# Altium PCB MotorPCB-v6.PcbDoc
Units mil, origin at the board's own origin, x right, y up, seen from the top; angles counter-clockwise.
Board outline 3900 x 3900 mil, 2 copper layers (Top Layer, Bottom Layer); 65 components, 63 nets, 245 pads, 83 vias.
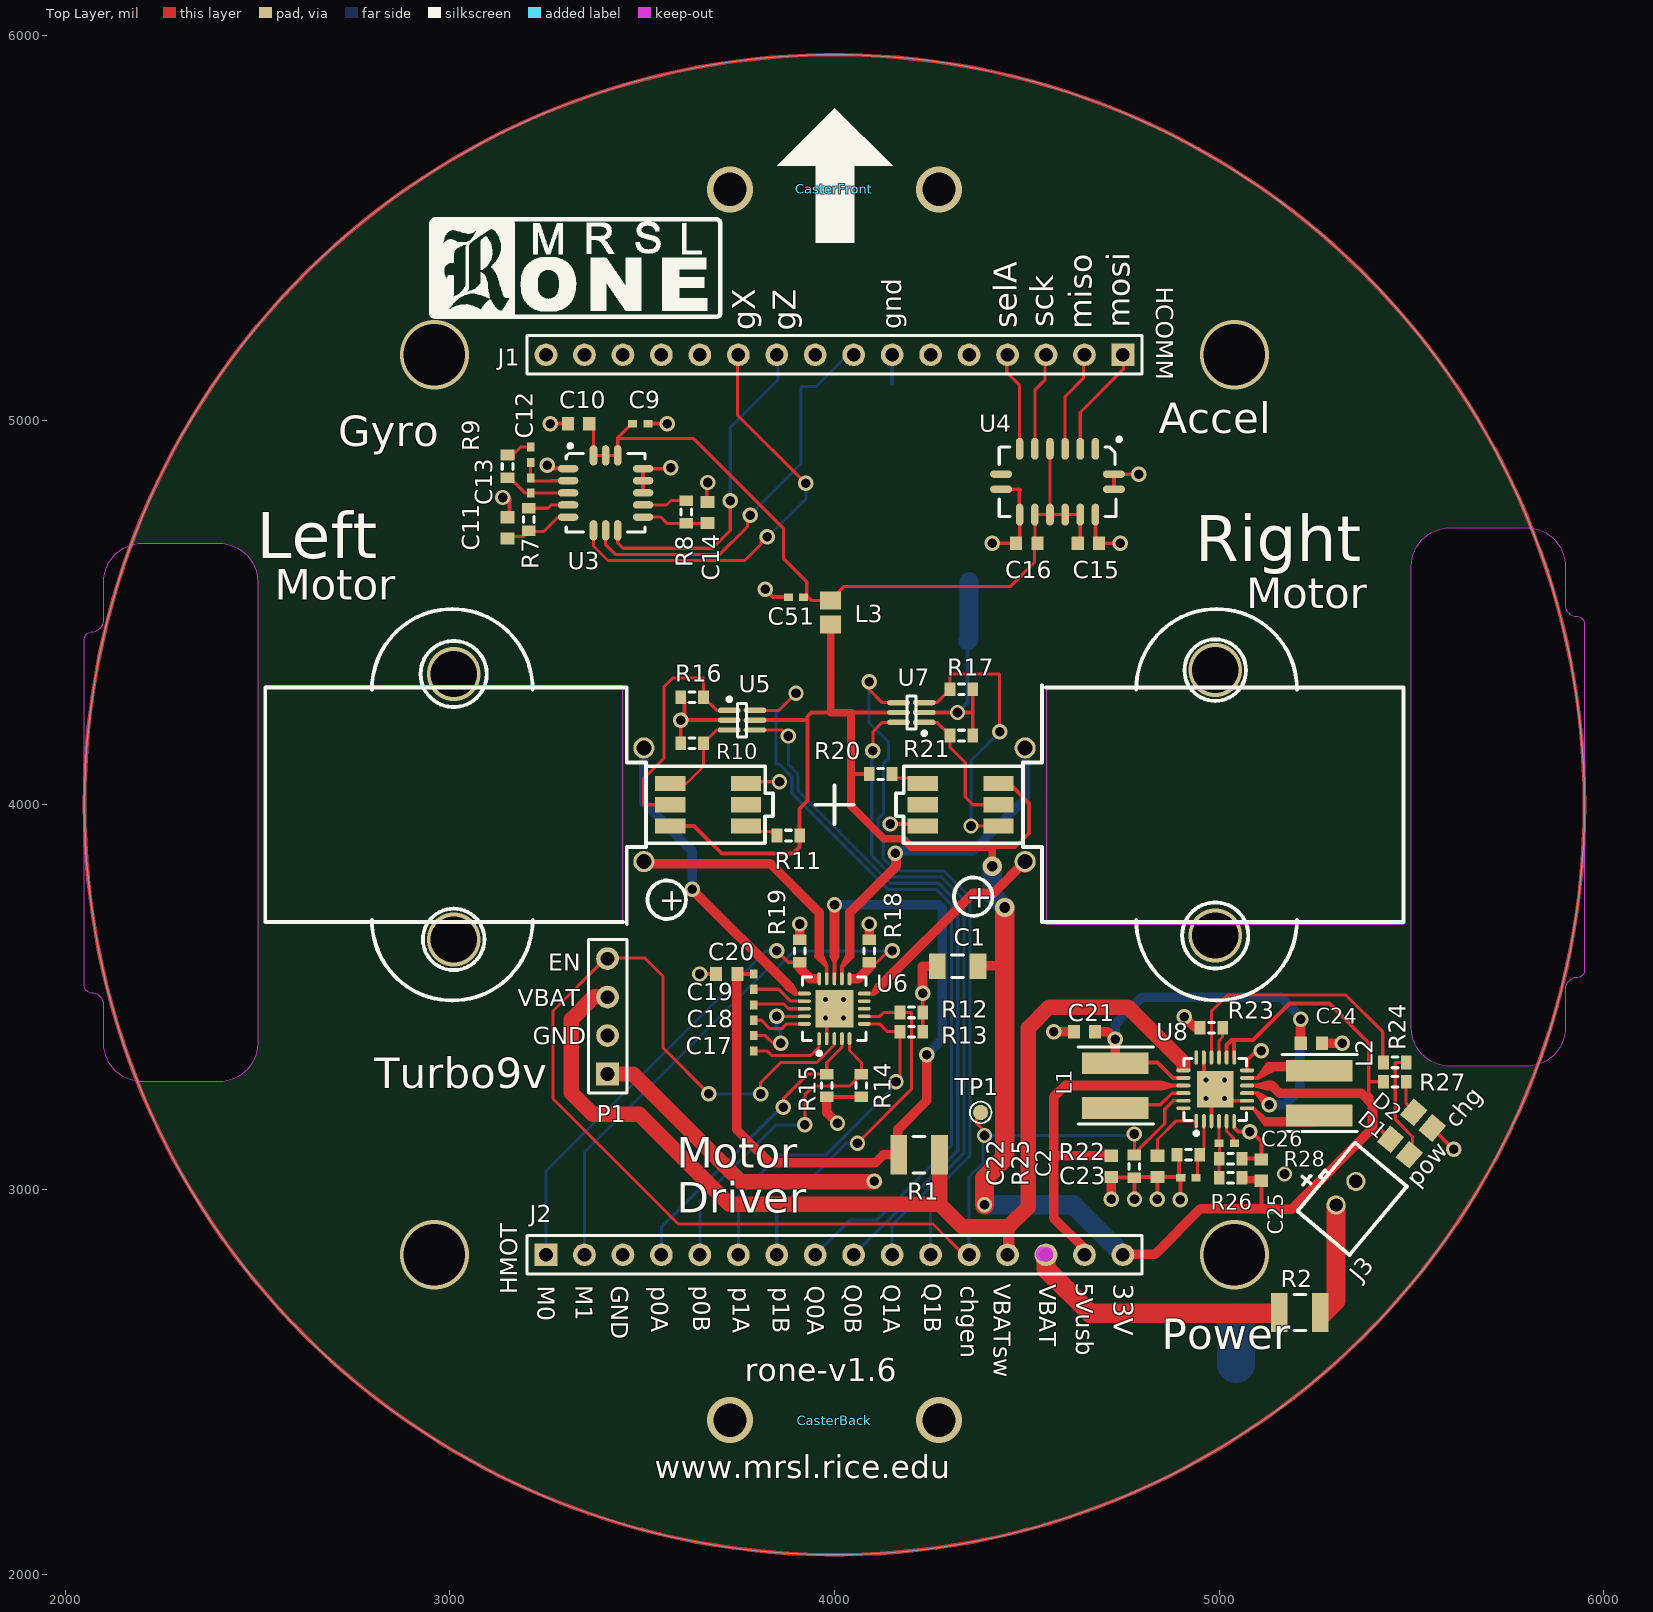
[diagram p0: Top Layer view]
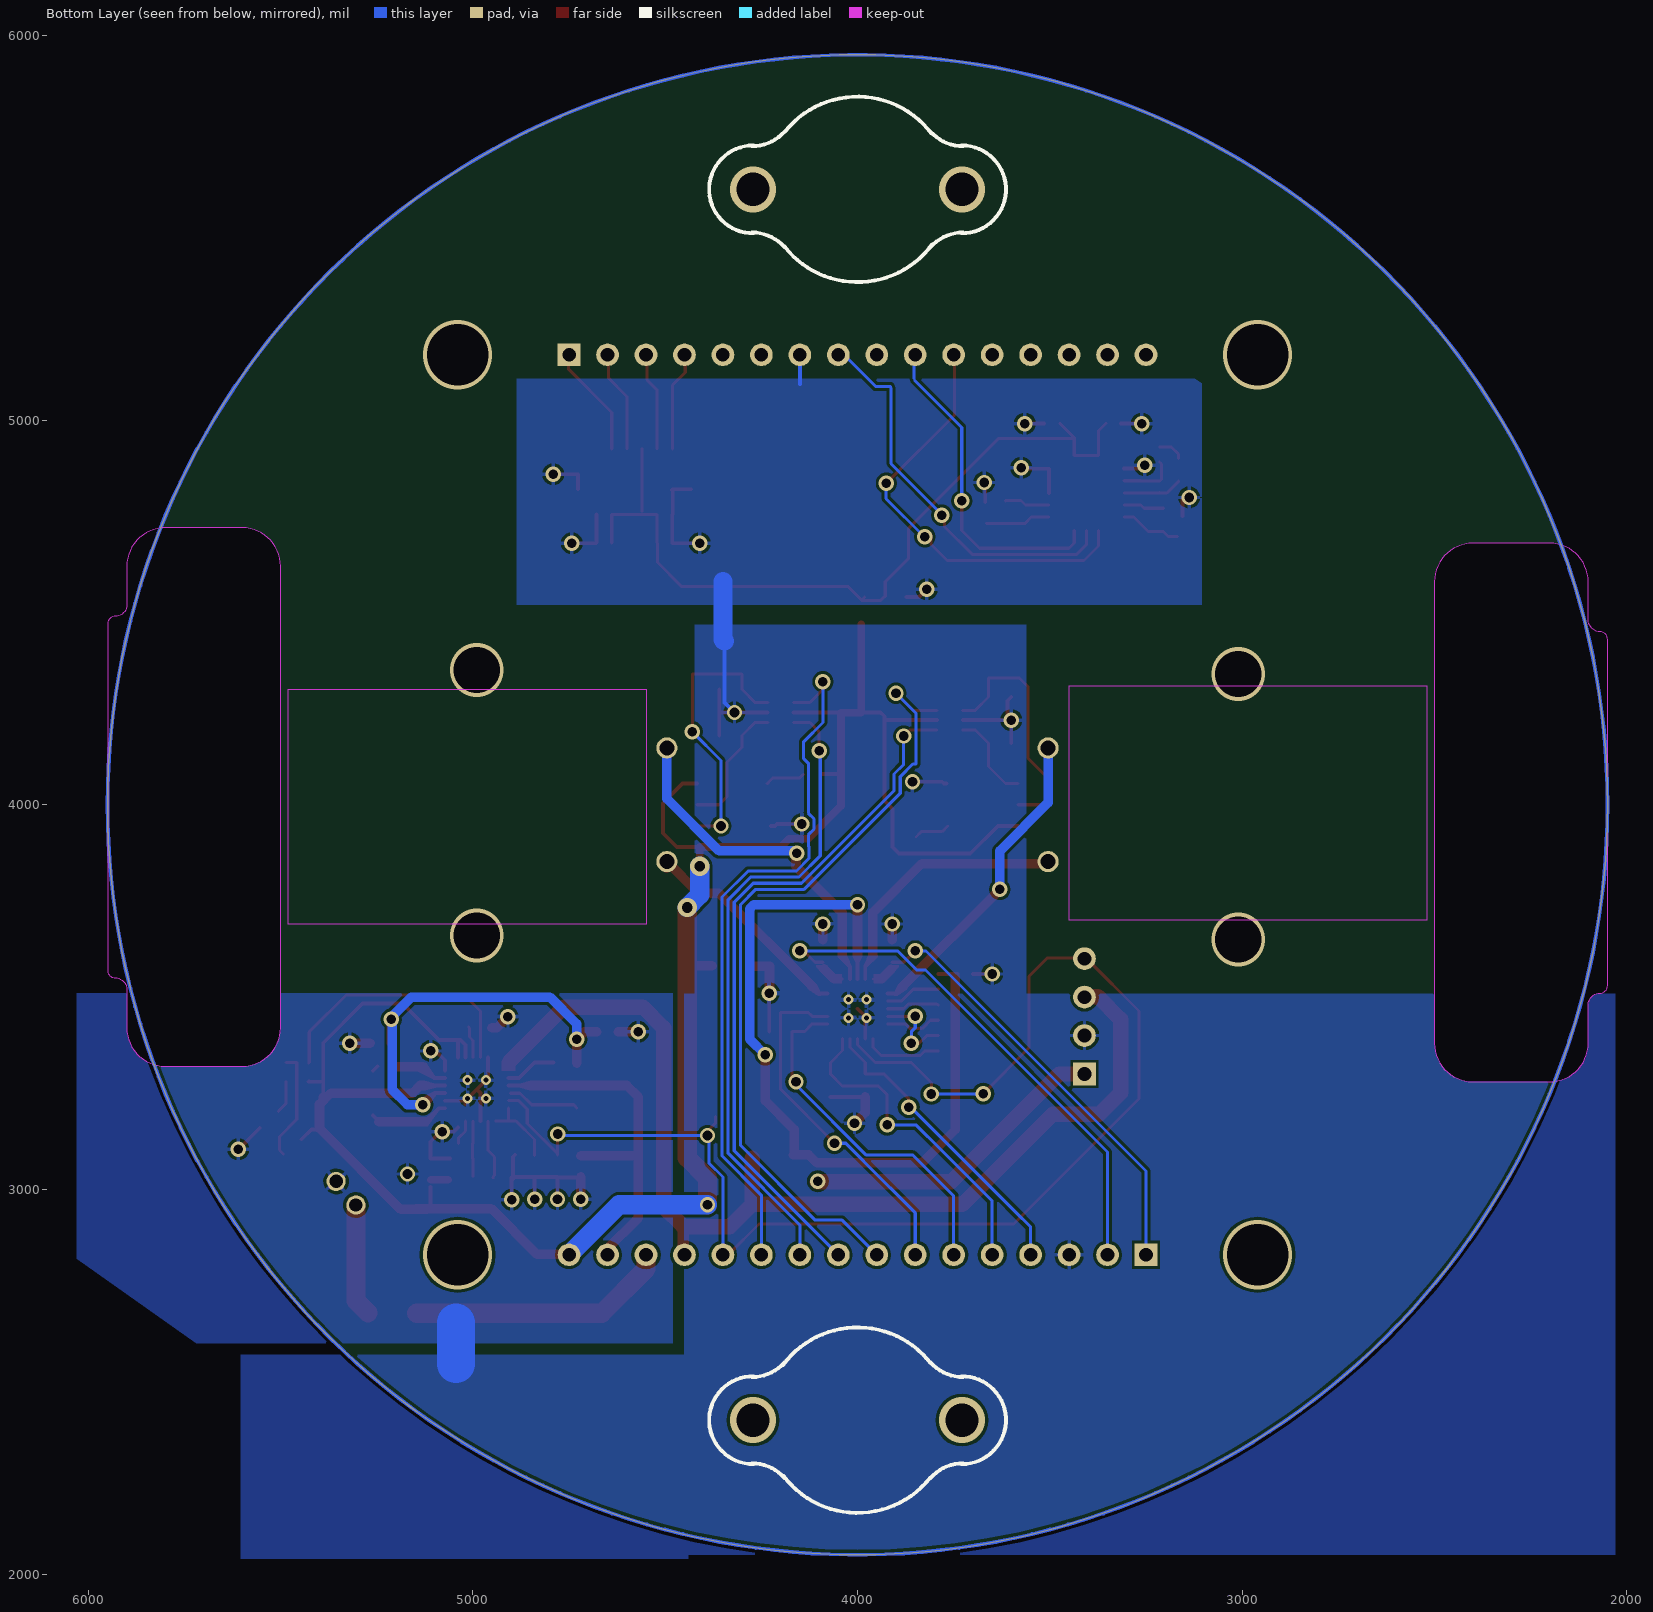
[diagram p1: Bottom Layer view, seen from below]

## Layer stack, top to bottom
Top Layer: signal copper 1.4
Dielectric: dielectric 12.6, FR-4, Dk 4.8
Bottom Layer: signal copper 1.4

## Board outline
4000,2050 cw(c4000,4000) 2050,4000 cw(c4000,4000) 4000,5950 cw(c4000,4000) 5950,4000 cw(c4000,4000)
cut-out: 2050,4430 cw(c2070,4430) 2070,4450 ccw(c2070,4480) 2100,4480 2100,4580 cw(c2200,4580) 2200,4680 2400,4680 cw(c2400,4580) 2500,4580 2500,3379.76 cw(c2400,3379.76) 2400,3279.76 2200,3279.76 cw(c2200,3379.76) 2100,3379.76 2100,3480 ccw(c2070,3480) 2070,3510 cw(c2070,3530) 2050,3530
cut-out: 5950,3570 cw(c5930,3570) 5930,3550 ccw(c5930,3520) 5900,3520 5900,3420 cw(c5800,3420) 5800,3320 5600,3320 cw(c5600,3420) 5500,3420 5500,4620.24 cw(c5600,4620.24) 5600,4720.24 5800,4720.24 cw(c5800,4620.24) 5900,4620.24 5900,4520 ccw(c5930,4520) 5930,4490 cw(c5930,4470) 5950,4470

## Design rules (kind name [scope] priority, off if disabled: settings)
Clearance [All] p1: gap=8
PolygonConnect [All] p1: connectstyle=Relief reliefconductorwidth=10 reliefentries=4 polygonreliefangle="90 Angle"
RoomDefinition motorEncoder [InComponentClass('motorEncoder')] p1: confinementstyle=ConfineIn formatcopy=TRUE lockcomponents=FALSE outline 0,0 2000,0 2000,1000 0,1000
RoomDefinition GyroAccelHeaders [InComponentClass('GyroAccelHeaders')] p2: confinementstyle=ConfineIn formatcopy=TRUE lockcomponents=FALSE outline 6000,2080 6350,2080 6350,2300 6000,2300
RoomDefinition power [InComponentClass('power')] p3: confinementstyle=ConfineIn formatcopy=TRUE lockcomponents=FALSE outline 6100,2000 8760,2000 8760,2340 6100,2340
RoutingVias [All] p1: holewidth=25 width=40 viastyle="Through Hole" minholewidth=25 minwidth=40 maxholewidth=25 maxwidth=40
SMDNeckDown [All] p1: percent=50.000
SilkscreenOverComponentPads [All] p1: minsilkscreentomaskgap=10
SolderMaskExpansion [All] p1: expansion=4
Width "Schematic Width Constraint_2" [InNet('VBAT')] p1: maxlimit=25 minlimit=10 preferedwidth=25 minimp=50.000000 maximp=50.000000 favimp=50.000000
Width "Schematic Width Constraint_15" [InNet('9V_OUT')] p2: maxlimit=25 minlimit=10 preferedwidth=20 minimp=50.000000 maximp=50.000000 favimp=50.000000
Width "Schematic Width Constraint_14" [InNet('NetJ3_1')] p3: maxlimit=25 minlimit=10 preferedwidth=25 minimp=50.000000 maximp=50.000000 favimp=50.000000
Width "Schematic Width Constraint_13" [InNet('5VUSB_SW')] p4: maxlimit=25 minlimit=10 preferedwidth=25 minimp=50.000000 maximp=50.000000 favimp=50.000000
Width "Schematic Width Constraint_12" [InNet('MOT_0B')] p5: maxlimit=25 minlimit=10 preferedwidth=20 minimp=50.000000 maximp=50.000000 favimp=50.000000
Width "Schematic Width Constraint_11" [InNet('MOT_0A')] p6: maxlimit=25 minlimit=10 preferedwidth=20 minimp=50.000000 maximp=50.000000 favimp=50.000000
Width "Schematic Width Constraint_10" [InNet('MOT1_B')] p7: maxlimit=25 minlimit=10 preferedwidth=20 minimp=50.000000 maximp=50.000000 favimp=50.000000
Width "Schematic Width Constraint_9" [InNet('MOT1_A')] p8: maxlimit=25 minlimit=10 preferedwidth=20 minimp=50.000000 maximp=50.000000 favimp=50.000000
Width "Schematic Width Constraint_8" [InNet('VBAT_MOT_SW')] p9: maxlimit=25 minlimit=10 preferedwidth=20 minimp=50.000000 maximp=50.000000 favimp=50.000000
Width "Schematic Width Constraint_7" [InNet('VBAT +300')] p10: maxlimit=25 minlimit=10 preferedwidth=25 minimp=50.000000 maximp=50.000000 favimp=50.000000
Width "Schematic Width Constraint_6" [InNet('NetL2_1')] p11: maxlimit=25 minlimit=10 preferedwidth=25 minimp=50.000000 maximp=50.000000 favimp=50.000000
Width "Schematic Width Constraint_5" [InNet('NetL2_2')] p12: maxlimit=25 minlimit=10 preferedwidth=25 minimp=50.000000 maximp=50.000000 favimp=50.000000
Width "Schematic Width Constraint_3" [InNet('VBAT_SW')] p13: maxlimit=50 minlimit=10 preferedwidth=25 minimp=50.000000 maximp=50.000000 favimp=50.000000
Width "Schematic Width Constraint_1" [InNet('GND')] p14: maxlimit=25 minlimit=10 preferedwidth=25 minimp=50.000000 maximp=50.000000 favimp=50.000000
Width "Schematic Width Constraint" [InNet('3.3V')] p15: maxlimit=100 minlimit=10 preferedwidth=25 minimp=50.000000 maximp=50.000000 favimp=50.000000
Width MotorWidth [InNetClass('MotorNets')] p16: maxlimit=25 minlimit=8 preferedwidth=25
Width [All] p17: maxlimit=8 minlimit=8 preferedwidth=8
27 further rules are at their usual default settings.

## Classes and differential pairs
component class GyroAccelHeaders: C1 C9 C10 C11 C12 C13 C14 C15 C16 C51 J1 J2 L3 R7 R8 R9 U3 U4
component class motorEncoder: C17 C18 C19 C20 CasterBack CasterFront Left P1 R1 R10 R11 R12 R13 R14 R15 R16 R17 R18 R19 R20 R21 Right U5 U6 U7
component class power: C2 C21 C22 C23 C24 C25 C26 D1 D2 J3 L1 L2 R2 R22 R23 R24 R25 R26 R27 R28 TP1 U8

## Components (designator, comment, footprint, x,y, rotation, side; value= is the part's Value field where it differs from the comment)
C1 "Cap Semi" CAPC3216L 4320,3580 r0 top
C2 "Cap" CAPC1608L 4839.84,3060 r270 top
C9 "Cap Semi" CAPC1005L 3495,4991 r180 top
C10 "Cap Semi" CAPC1608L 3335,4991 r0 top
C11 "Cap Semi" CAPC1608L 3150,4720 r270 top
C12 "Cap Semi" CAPC1005L 3210,4910 r270 top
C13 "Cap Semi" CAPC1005L 3210,4830 r90 top
C14 "Cap Semi" CAPC1608L 3670,4760 r270 top
C15 "Cap Semi" CAPC1608L 4660,4680 r180 top
C16 "Cap Semi" CAPC1608L 4500,4680 r0 top
C17 "Cap Semi" CAPC1005L 3790,3380 r270 top
C18 "Cap Semi" CAPC1005L 3789.69,3459.37 r270 top
C19 "Cap Semi" CAPC1005L 3790,3540 r270 top
C20 "Cap Semi" CAPC1608L 3720,3560 r0 top
C21 "Cap" CAPC1608L 4650,3410 r0 top
C22 "Cap" CAPC1608L 4720,3060 r90 top
C23 "Cap" CAPC1005L 4920,3030.16 r0 top
C24 "Cap" CAPC1608L 5240,3380 r0 top
C25 "Cap" CAPC1608L 5110,3050 r270 top
C26 "Cap" CAPC1005L 5020,3120 r0 top
C51 "Cap Semi" CAPC1005L 3900,4540 r0 top
CasterBack "non connect" "3/8\"Caster" 4000,2400 r0 top
CasterFront "non connect" "3/8\"Caster" 4000,5600 r180 top locked
D1 "Charge" INDC2012L 5470,3110 r320 top
D2 "Power" INDC2012L 5530,3180 r320 top
J1 "Header 16" HDR1X16 4750,5170 r180 top
J2 "Header 16" HDR1X16 3250,2830 r0 top
J3 "BAT" BatteryConnJST 5330,2990 r50 top
L1 "3.3uH" Inductor-Power 4730,3270 r90 top
L2 "2.2uH" Inductor-Power 5260,3250.16 r90 top
L3 "Inductor" INDC2012L 3990,4500 r270 top
Left "motorEncoder" motorEncoder 3780,4000 r180 top locked (schematic designator MOT_L)
P1 "Header 4" HDR1X4 3410,3300 r90 top
R1 "Res3" RESC3225L 4220,3090 r180 top
R2 "Res3" RESC3225L 5210,2680 r0 top
R7 "Res3" RESC1608L 3205,4741.47 r90 top
R8 "Res3" RESC1608L 3615,4761 r90 top
R9 "Res3" RESC1608L 3150,4880 r90 top
R10 "" RESC1608L 3630,4160 r180 top
R11 "" RESC1608L 3880,3920 r0 top
R12 "Res3" RESC1608L 4200,3460 r0 top
R13 "Res3" RESC1608L 4200,3410 r0 top
R14 "Res3" RESC1608L 4070,3270 r270 top
R15 "Res3" RESC1608L 3980,3270 r270 top
R16 "" RESC1608L 3630,4280 r0 top
R17 "" RESC1608L 4330,4300 r180 top
R18 "Res3" RESC1608L 4090,3620 r90 top
R19 "Res3" RESC1608L 3910,3620 r90 top
R20 "" RESC1608L 4120,4080 r180 top
R21 "" RESC1608L 4330,4180 r180 top
R22 "Res3" RESC1608L 4920,3090.16 r0 top
R23 "Res3" RESC1608L 4980,3420 r180 top
R24 "Res3" RESC1608L 5457,3330 r0 top
R25 "Res3" RESC1608L 4779.84,3060 r90 top
R26 "Res3" RESC1608L 5030,3030 r180 top
R27 "Res3" RESC1608L 5457,3280 r180 top
R28 "Res3" RESC1608L 5030,3080 r0 top
Right "motorEncoder" motorEncoder 4220,4000 r0 top locked (schematic designator MOT_R)
TP1 "TestPoint" TestPoint 4380,3200 r0 top
U3 "LPY510AL" LGA16 3405,4811 r0 top
U4 "LIS3LV02DL" "LGA16 (4.4x7.5x1 mm)" 4580,4840 r0 top
U5 "schmit trigger" DCK(R-PDSO-C6) 3760,4220 r0 top
U6 "MOTOR-A3906" QFN-20 3999.69,3469.69 r90 top
U7 "schmit trigger" DCK(R-PDSO-C6) 4200,4240 r180 top
U8 "LTC3566" QFN-24 4990,3260.16 r90 top

## Footprints (in the part's own frame and the unit in brackets; to place one, negate y for a bottom-side part, rotate by r counter-clockwise, add the part's x,y. Pads: shape width x height; smd on the part's side, far side on the other; paste and mask are expansions set on the pad)
"3/8\"Caster" [mil] "3/8\" caster for board"
BatteryConnJST [mil] "Connector for Battery"
  round 50 hole 35: 1(-40,0) 2(40,0)
  silkscreen extent -117,-110 116,115
CAPC1005L [mm] "Chip Capacitor, Body 1.0x0.5mm, IPC High Density"
  rect 0.6x0.5 smd: 1(-0.5,0) 2(0.5,0)
  body extent -0.55,-0.3 0.55,0.3, height 1.3
CAPC1608L [mm] "Chip Capacitor, Body 1.6x0.8mm, IPC High Density"
  rect 0.8x0.9 smd: 1(-0.7,0) 2(0.7,0)
  body extent -0.87,-0.48 0.87,0.48, height 1.3
CAPC3216L [mm] "Chip Capacitor, Body 3.2x1.6mm, IPC High Density"
  rect 1.1x1.7 smd: 1(-1.35,0) 2(1.35,0)
  silkscreen extent -0.4,-0.75 0.4,0.75, body extent -1.7,-0.9 1.7,0.9, height 1.3
DCK(R-PDSO-C6) [mm] "TSOP, 6-Leads, Body 2.2x1.4mm (max), Pitch 0.65mm, IPC Medium Density"
  oval 1.5x0.35 smd: 1(-0.85,0.65) 2(-0.85,0) 3(-0.85,-0.65) 4(0.85,-0.65) 5(0.85,0) 6(0.85,0.65)
  silkscreen extent -0.97,-1.1 0.3,1.5, body extent -0.7,-1.07 0.7,1.08, height 1.1
HDR1X4 [mm] "Connector; Header; 4 Position"
  rect 1.5x1.5 hole 0.9: 1(0,0)
  round 1.5 hole 0.9: 2(2.54,0) 3(5.08,0) 4(7.62,0)
  silkscreen extent -1.27,-1.27 8.89,1.27
HDR1X16 [mm] "Connector; Header; 16 Position"
  rect 1.5x1.5 hole 0.9: 1(0,0)
  round 1.5 hole 0.9: 2(2.54,0) 3(5.08,0) 4(7.62,0) 5(10.16,0) 6(12.7,0) 7(15.24,0) 8(17.78,0) 9(20.32,0) 10(22.86,0) 11(25.4,0) 12(27.94,0) 13(30.48,0) 14(33.02,0) 15(35.56,0) 16(38.1,0)
  silkscreen extent -1.27,-1.27 39.37,1.27
INDC2012L [mm] "Chip Inductor, Body 2.0x1.2mm, IPC High Density"
  rect 1.2x1.4 smd: 1(-0.8,0) 2(0.8,0)
  body extent -1.1,-0.7 1.1,0.7, height 0.55
Inductor-Power [mil]
  rect 56.5x173 smd: 1(-58.25,0) 2(58.25,0)
  silkscreen extent -100,-100 100,97
LGA16 [mm] "LCC, 16-Pins, Body 5.2x5.2mm (max), Pitch 0.80mm, IPC Medium Density"
  oval 1.35x0.5 smd: 1(-2.475,1.6) 2(-2.475,0.8) 3(-2.475,0) 4(-2.475,-0.8) 5(-2.475,-1.6) 9(2.475,-1.6) 10(2.475,-0.8) 11(2.475,0) 12(2.475,0.8) 13(2.475,1.6)
  oval 0.5x1.35 smd: 6(-0.8,-2.475) 7(0,-2.475) 8(0.8,-2.475) 14(0.8,2.475) 15(0,2.475) 16(-0.8,2.475)
  silkscreen extent -2.6,-2.6 2.6,3.22, body extent -2.5,-2.5 2.5,2.5, height 1.6
"LGA16 (4.4x7.5x1 mm)" [mm] "LCC, 16-Pins, Body 7.7x4.6mm (max), Pitch 1.00mm, IPC Medium Density"
  oval 0.5x1.45 smd: 1(2.5,2.175) 2(1.5,2.175) 3(0.5,2.175) 4(-0.5,2.175) 5(-1.5,2.175) 6(-2.5,2.175) 9(-2.5,-2.175) 10(-1.5,-2.175) 11(-0.5,-2.175) 12(0.5,-2.175) 13(1.5,-2.175) 14(2.5,-2.175)
  oval 1.45x0.5 smd: 7(-3.725,0.5) 8(-3.725,-0.5) 15(3.725,-0.5) 16(3.725,0.5)
  silkscreen extent -3.85,-2.3 4.19,2.92, body extent -3.75,-2.2 3.75,2.2, height 1
motorEncoder [mm] "Precision Wire Wound Inductor, 2-Leads, Body 2.5x2.3mm, IPC Medium Density"
  rect 2x1 smd: A(0.25,1.4) C(5.25,1.4) E1(5.25,0) E2(5.25,-1.4) K(0.25,-1.4) NC(0.25,0)
  round 1.4 hole 1: M1(7,3.75) M2(7,-3.75)
  Keep-Out Layer region: 8.382,-7.874 32.004,-7.874 32.004,7.62 8.382,7.62
  silkscreen extent -1.52,-12.93 32,12.93
QFN-20 [mm] "QFN, 20-Leads, Body 4.2x4.2mm (max), Pitch 0.50mm, IPC Medium Density"
  oval 0.85x0.25 smd: 1(-1.975,1) 2(-1.975,0.5) 3(-1.975,0) 4(-1.975,-0.5) 5(-1.975,-1) 11(1.975,-1) 12(1.975,-0.5) 13(1.975,0) 14(1.975,0.5) 15(1.975,1)
  oval 0.25x0.85 smd: 6(-1,-1.975) 7(-0.5,-1.975) 8(0,-1.975) 9(0.5,-1.975) 10(1,-1.975) 16(1,1.975) 17(0.5,1.975) 18(0,1.975) 19(-0.5,1.975) 20(-1,1.975)
  rect 2.5x2.5 smd: 21(0,0)
  silkscreen extent -3.07,-2.1 2.1,2.1, body extent -2.07,-2.07 2.07,2.07, height 0.8
QFN-24 [mm] "QFN, 24-Leads, Body 4.1x4.1mm (max), Pitch 0.50mm, IPC Medium Density"
  oval 0.95x0.25 smd: 1(-2.1,1.25) 2(-2.1,0.75) 3(-2.1,0.25) 4(-2.1,-0.25) 5(-2.1,-0.75) 6(-2.1,-1.25) 13(2.1,-1.25) 14(2.1,-0.75) 15(2.1,-0.25) 16(2.1,0.25) 17(2.1,0.75) 18(2.1,1.25)
  oval 0.25x0.95 smd: 7(-1.25,-2.1) 8(-0.75,-2.1) 9(-0.25,-2.1) 10(0.25,-2.1) 11(0.75,-2.1) 12(1.25,-2.1) 19(1.25,2.1) 20(0.75,2.1) 21(0.25,2.1) 22(-0.25,2.1) 23(-0.75,2.1) 24(-1.25,2.1)
  rect 2.4x2.4 smd: 25(0,0)
  silkscreen extent -3.02,-2.05 2.05,2.05, body extent -2.05,-2.05 2.05,2.05, height 0.8
RESC1608L [mm] "Chip Resistor, Body 1.6x0.8mm, IPC High Density"
  rect 0.7x0.9 smd: 1(-0.75,0) 2(0.75,0)
  silkscreen extent -0.2,-0.35 0.2,0.35, body extent -0.85,-0.48 0.85,0.48, height 0.9
RESC3225L [mm] "Chip Resistor, Body 3.2x2.5mm, IPC High Density"
  rect 1.1x2.6 smd: 1(-1.35,0) 2(1.35,0)
  silkscreen extent -0.4,-1.2 0.4,1.2, body extent -1.68,-1.32 1.68,1.32, height 0.9
TestPoint [mil]
  round 40 smd: 1(0,0)
  silkscreen extent -28,-28 28,28

## Part data
C1 C9 C10 C11 C12 C13 C14 C15 C16 C17 C18 C19 C20 C51: "Capacitor (Semiconductor SIM Model)"
C2 C21 C22 C23 C24 C25 C26: "Capacitor"
CasterBack CasterFront: library part Caster, "This is just a space saver to get the caster onto the pcb"
D1 D2: library part LED2, "Typical RED, GREEN, YELLOW, AMBER GaAs LED"
J1 J2: "Header, 16-Pin"
J3: library part BatteryConnJST
L1 L2: library part Inductor
P1: "Header, 4-Pin"
R1 R2 R7 R8 R9 R12 R13 R14 R15 R18 R19 R22 R23 R24 R25 R26 R27 R28: "Resistor"
R10 R11 R16 R17 R20 R21: library part Res3, "Resistor"

## Via types
v1: diameter 40, hole 25, Top Layer to Bottom Layer, 61 vias
v2: diameter 25.98, hole 12.99, Top Layer to Bottom Layer, tented top, 8 vias
v3: diameter 140, hole 120, Top Layer to Bottom Layer, 4 vias
v4: diameter 180/180 (per signal layer), hole 160, Top Layer to Bottom Layer, 4 vias
v5: diameter 120, hole 86.61, Top Layer to Bottom Layer, 4 vias
v6: diameter 50, hole 28, Top Layer to Bottom Layer, 2 vias

## Nets (pads, with @x,y where several pads share a name; then routed paths per layer and width w, separated by ;. In a path a pad name is that pad's centre, name@x,y a point inside that pad or via, vN(x,y) a via of type N, cw(c..) or ccw(c..) an arc to the next point about the centre after c; other vN are vias at no path point)
3.3V: C1.2 C25.2 D1.1 J2.16 L3.2 Left.C R11.2 R20.2 R26.1 R27.2 Right.C U5.5 U7.5 U8.10 U8.13 U8.14 | length 5835.1
  Top Layer w10: Left.C@3583.15,3944.88 3635.12,3944.88 3707,3873 3892,3873 3906.5,3887.5 ; U5.5 3930,4220 ; 3907,3888 3909.53,3890.53 R11.2 3909.53,3989.53 3910,3990 ; 3909.34,3989.66 3930,4010.31 3930,4220 ; 3990,4240 3940,4240 3930,4230 3930,4220 ; 4043,4240 U7.5 ; 4046,4080 R20.2 ; 4410,3890 4470,3890 4506,3926 4506,4004 4454.88,4055.12 Right.C@4416.85,4055.12 ; J2.16 J2.16@4751,2831 ; U8.14 5019.53,3375.49 5032.02,3387.98 5040,3387.98 ; U8.13 5039.21,3387.19 5040,3387.98 ; U8.10 5130,3270 ; 5110,2950 5110,3006 ; 5389,3239 5389,3381 5287,3483 5183,3483 5087.98,3387.98 5040,3387.98 ; 5389,3280 R27.2 R27.2@5426.47,3281 ; 5400,3156 5420.12,3156 D1.1
  Top Layer w20: L3.2 3990,4310 3990,4240 3991,4239 4043,4239 4043,3997 4128,3912 4178.21,3912 4200.21,3890 4410,3890 v6(4410,3840) ; 4448,3566 4452,3570 ; R26.1@5064.53,3025 C25.2@5110,3025
  Top Layer w25: C1.2@4378,3581 4431,3581 4443,3593 ; J2.16@4751,2831 4833,2831 4952,2950 5110,2950 ; 5119.5,2949 5147,2949 5148,2948 5188,2948 5399,3159 5399,3221 5370,3250 5157.28,3250 5137.28,3270 5130,3270 ; 5385,3235 5389,3239
  Top Layer w50: v1(4390,2960) 4390,3029 4443,3082 4443,3593 v6(4443,3733)
  Bottom Layer w50: v1(4390,2960) 4620,2960 J2.16 ; v6(4410,3840) 4410,3766 v6(4443,3733)
3.3VLDO: C2.1 U8.1 U8.24 | length 196.4
  Top Layer w8: C2.1 4839.84,3129.84 4887.48,3177.48 4922.52,3177.48 U8.1 ; 4907.32,3177.48 U8.24
5VUSB_SW: C22.2 J2.15 U8.21 | length 944.3
  Top Layer w10: 4850,3270 U8.21
  Top Layer w25: J2.15@4651,2830 4651,2845 4570,2926 4570,2950 4570,3090 ; C22.2 4572.44,3087.56 4570,3090 ; 4850,3270 4600,3270 4570,3240 4570,3090
9V_OUT: P1.1 | length 810.4
  Top Layer w25: v1@4111,3020 v1@4112,3019
  Top Layer w40: P1.1 3476,3300 3756,3020 v1@4103,3020
  other v1: 4103,3021
CHRG: R24.1 U8.16 | length 703.7
  Top Layer w8: U8.16 4980.16,3463.16 5022,3505 5330,3505 5425.5,3409.5 5425.5,3330.5 R24.1@5427,3329
CHRGEN: J2.12 P1.4 R25.2 TP1.1 U6.3 U8.23 | length 3613.7
  Top Layer w8: P1.4@3404,3600 3268,3464 3268,3236 3594,2910 4256,2910 4336,2830 J2.12 J2.12@4351,2831 ; P1.4@3420,3602 3506,3602 3554,3554 3554,3368 v1(3673,3249) ; v1@3808,3249 3808,3278 3860,3330 3953.81,3330 4000,3376.19 4000,3391.62 U6.3 ; TP1.1@4369,3190 4369,3173 4390,3152 v1(4390,3140) ; v1(4779,3144) 4779,3140.68 4779.84,3139.84 R25.2@4779.84,3092.47 ; R25.2 R25.2@4779.84,3092.47 ; U8.23 4880.63,3230.63 4858.69,3208.69 4858.69,3171.31 R25.2@4779.84,3092.47
  Bottom Layer w8: 3693,3247 3694,3248 v1(3808,3248) ; J2.12 4350,3032 4386,3068 4386,3130 v1@4394,3138 ; v1@4390,3139.84 4779.84,3139.84 4779,3140.68 v1(4779,3144)
GND: C1.1 C2.2 C9.1 C10.1 C11.1 C14.1 C15.1 C16.1 C20.1 C21.1 C22.1 C23.1 C24.2 C25.1 C51.1 D2.2 J1.7 J2.3 J3.2 Left.K P1.2 R10.2 R12.2 R13.2 R14.2 R15.2 R16.1 R17.1 R18.2 R19.2 R21.1 R22.1 R23.2 R25.1 R28.2 Right.K U3.1 U3.11 U3.12 U3.13 U4.8 U4.9 U4.14 U4.15 U4.16 U5.2 U6.2 U6.21 U7.2 U8.3 U8.6 U8.8 U8.12 U8.17 U8.25 | length 3962.3
  Top Layer w10: C11.1@3155,4750.69 v1@3155,4797 ; v1@3253,4879 v1(3253,4883) 3262.01,4873.99 U3.1 ; v1@3259,4989 v1(3261,4991) C10.1@3315.32,4991 ; U3.11 3502.44,4873.56 3576.56,4873.56 v1(3574.12,4876) ; C9.1 v1(3565,4991) ; R10.2 3600.47,4210.47 v1@3610,4220 ; R16.1 3610,4270.47 v1@3610,4220 ; v1(3650,3560) C20.1@3700.31,3560 ; C14.1@3668,4787 3668,4820 v1@3670,4822 ; U5.2 v1@3610,4220 ; Left.K@3768,4055.12 3775.12,4055.12 3780,4060 v1(3857,4060) ; v1(3820,4560) 3840,4540 C51.1@3872.44,4540 ; R15.2 R14.2 ; U6.2 3980,3450 U6.21 ; v1(4145,3950) 4210,3950 4214.88,3945.12 4214.88,3944.88 Right.K@4225,3944.88 ; R13.2 4229.53,3509.53 v1(4230,3510) ; U7.2 v1(4320,4240) 4359.53,4240 ; R21.1 4359.53,4240 ; R17.1 4359.53,4240 ; v1@4428,4680 C16.1@4480.31,4680 ; U4.8 4480.31,4820.31 ; U4.9@4480.31,4755.69 4480.31,4820.31 ; C16.1@4481.57,4680.43 U4.9 ; 4482,4818.63 4480.31,4820.31 ; C15.1@4678.43,4682.43 U4.14 ; C15.1@4679.68,4680 v1(4743,4680) ; C22.1 4721.97,3030.47 R25.1 ; U4.15 4726.65,4859.35 v1(4791.35,4859.35) ; v1@4780,2980 4779.84,2980.16 R25.1 ; v1@4839.84,2980.16 C2.2 ; C23.1@4890.16,3032.44 C2.2 ; R22.1 4896,3084.63 4896,3026.6 4900,3030.6 4900,2980 4899,2979 v1@4899,2976 ; U8.17 4960.47,3289.69 U8.25 ; U8.3 4980.16,3250.32 U8.25 ; U8.25@5019.53,3221.47 U8.25@5019.53,3230.63 ; U8.6@5039.21,3160.79 5049.21,3150.79 v1@5080,3150.79 ; R28.2 5110,3080 5110,3124 v1@5081,3153 ; U8.8 U8.25@5019.53,3230.63 ; U8.12 5072.68,3335.68 5097,3360 v1(5110,3360) ; D2.2 5609.88,3104 v1(5610,3104) ; R25.1 4781.81,3032.44 C2.2 ; U8.25 U8.25@5019.53,3230.63
  Top Layer w25: R19.2 v1(3910,3690) ; R15.2 3980,3200 v1(4008,3172) ; R18.2 v1(4090,3690) ; v1@4229,3513 4229,3580 C1.1 ; v1(4570,3410) C21.1 ; v1(4720,2974) C22.1 ; v1@4908,3450 4938,3420 R23.2 ; C24.2 5310,3380 v1(5320,3380)
  Bottom Layer w10: 4150,5094 J1.7 ; v1(4320,4240) 4346,4266 4346,4426
  Bottom Layer w50: 4346,4426 4350,4430 4350,4580
  Bottom Layer w100: 5044,2546 5044,2653.71
  other v1: 4899,2973 4780,2974 4839,2974 5170,3040 5080,3150 4909,3449 3600,4220 4410,4680 3138,4799 3671,4838
  other v2: 4966.38,3236.54 5013.62,3236.54 4966.38,3283.78 5013.62,3283.78 3976.06,3446.06 4023.31,3446.06 3976.06,3493.31 4023.31,3493.31
GYRO_VREF: J1.8 U3.7 | length 1080.9
  Top Layer w8: U3.7 3405,4676 3430,4651 3702,4651 3774,4723 3774,4764 3781,4757 v1(3781,4753)
  Bottom Layer w8: v1(3781,4753) 3781,4757 3774,4764 3790,4764 3913,4887 3913,5083 ; 3914,5087 3952,5087 J1.8@4052,5187
GYROA_X_1: C11.2 R7.1 U3.5 | length 160
  Top Layer w8: 3168.31,4698 3192.94,4698 3205.94,4711 3245,4711 3282.01,4748.01 U3.5
GYROA_X_4: J1.11 U3.6 | length 1235.4
  Top Layer w8: U3.6 3373.5,4672.87 3411.37,4635 3767,4635 3809,4677 3809,4703 3826,4696 3817,4711 3825,4703 v1(3825,4697) ; J1.11@3748,5193 3748,5013 v1(3925,4836)
  Bottom Layer w8: v1(3825,4697) 3825,4703 3817,4711 3826,4696 3926,4796 3926,4821 3925,4822 v1(3925,4836)
GYROA_Z_1: C14.2 R8.1 U3.9 | length 169.9
  Top Layer w8: U3.9 3547.99,4748.01 3565,4731 3614.53,4731 R8.1 3664.84,4731.47 C14.2@3665,4731.31
GYROA_Z_4: J1.10 U3.8 | length 873.7
  Top Layer w8: U3.8 3436.5,4680.5 3450,4667 3683,4667 3729,4713 v1(3729,4790)
  Bottom Layer w8: v1(3729,4790) 3729,4981 3851,5103 ; 3853,5108 J1.10@3853,5191
MOT0_CUR: J2.1 R19.1 U6.15 | length 1185.7
  Top Layer w8: v1(3850,3620) 3879.53,3590.47 R19.1 ; 3937.56,3547.44 U6.15
  Top Layer w25: 3912.26,3572.74 3937.56,3547.44
  Bottom Layer w8: J2.1 3250,3048 3822,3620 v1(3850,3620)
MOT0_PWMA: J2.4 R15.1 U6.4 | length 788.7
  Top Layer w8: v1@3867,3215 3867,3236.06 3930.47,3299.53 R15.1 3980,3330 4019.37,3369.37 U6.4
  Bottom Layer w8: J2.4@3550,2827 3550,2902 3590,2942 3863,3215 v1@3865,3215
  other v1: 3867,3214
MOT0_PWMB: J2.5 R14.1 U6.5 | length 847.2
  Top Layer w8: v1(3923,3168) 3923,3246 3946,3269 4040,3269 R14.1@4070,3299 ; U6.5 4039.06,3360.94 4070,3330 R14.1
  Bottom Layer w8: J2.5 3650,2970 3785,3105 3847,3167 3920,3167 3922,3167 v1(3923,3168)
MOT1_A: Right.M2 U6.10 | length 577.1
  Top Layer w10: U6.10 4099.06,3509.06 4120,3530
  Top Layer w25: 4120,3530 4360,3770 4413.23,3770 Right.M2 Right.M2@4495.59,3835.59
MOT1_B: Right.M1 U6.12 | length 928.3
  Top Layer w10: U6.12 4019.37,3579.37 4040,3600 4040,3610
  Top Layer w25: 4040,3610 4040,3720 4160,3840 4160,3880 4158,3878 v1(4158,3874)
  Bottom Layer w25: v1(4158,3874) 4158,3878 4160,3880 4360,3880 4495.59,4015.59 Right.M1
MOT1_CUR: J2.2 R18.1 U6.11 | length 1411.3
  Top Layer w8: U6.11 4061.44,3547.44 ; R18.1 4110.47,3590.47 4140,3620 v1(4150,3620)
  Top Layer w25: 4061.44,3547.44 4087.24,3573.24
  Bottom Layer w8: J2.2 3350,3097 3820.75,3567.75 ; 3823.22,3570 3845.25,3570 3895.25,3620 v1(4150,3620)
MOT1_PWMA: J2.6 R13.1 U6.6 | length 927
  Top Layer w8: U6.6 4117.68,3430.32 4138,3410 R13.1 4170.47,3290.47 v1(4160,3280)
  Bottom Layer w8: J2.6 3750,2983 3856,3089 3977,3089 4154,3266 v1@4154,3283
MOT1_PWMB: J2.7 R12.1 U6.7 | length 918.9
  Top Layer w8: v1(4060,3120) 4200,3260 4200,3460 4128.15,3460 4118.15,3450 U6.7
  Bottom Layer w8: J2.7 3850,2939 3983.63,3072.63 3983.63,3073 4030.63,3120 v1(4060,3120)
MOT_0A: Left.M2 U6.16 | length 823.8
  Top Layer w10: 3880,3530 3900.94,3509.06 U6.16
  Top Layer w25: v1(3630,3780) 3880,3530
  Bottom Layer w25: Left.M2 3504.41,4005.59 3630,3880 v1(3630,3780)
MOT_0B: Left.M1 U6.14 | length 681.3
  Top Layer w10: 3960,3600 3980,3580 U6.14
  Top Layer w25: Left.M1 3509.77,3847 3833,3847 3960,3720 3960,3610
NetC12_1: C12.1 R9.2 | length 68.9
  Top Layer w8: R9.2@3165,4900.53 3165,4911 3185,4931 3185.32,4930.68 C12.1@3215,4930.68
NetC12_2: C12.2 C13.2 U3.2 | length 147
  Top Layer w8: C12.2@3215,4891.31 3210,4886.31 3210,4845.69 3213.69,4842 3263.01,4842 3263.5,4842.5 U3.2
NetC13_1: C13.1 R9.1 U3.3 | length 155.7
  Top Layer w8: R9.1@3165,4841.47 3165,4841 3195,4811 3214.68,4811 3215,4811.32 3215.32,4811 U3.3
NetC17_1: C17.1 U6.19 | length 224.2
  Top Layer w8: C17.1 3820.31,3399.69 3840,3380 v1(3860,3380) ; v1(3850,3450) U6.19
  Bottom Layer w8: v1(3850,3450) 3850,3420 3860,3410 v1(3860,3380)
NetC17_2: C17.2 U6.1 | length 206.3
  Top Layer w8: C17.2 3824.43,3360.31 3836.75,3348 3938,3348 3960.32,3370.32 U6.1
NetC18_1: C18.1 U6.18 | length 138.2
  Top Layer w8: C18.1@3790,3479.06 3792.94,3482 3868,3482 3880.31,3469.69 U6.18
NetC18_2: C18.2 U6.20 | length 146.3
  Top Layer w8: C18.2 3810.31,3439.69 3832,3418 3863.25,3418 3875.57,3430.32 U6.20
NetC19_2: C19.2 U6.17 | length 144.7
  Top Layer w8: C19.2 3855.04,3520.31 3885.98,3489.37 U6.17
NetC23_2: C23.2 R22.2 U8.2 | length 155.6
  Top Layer w8: C23.2@4947.56,3030.16 4946,3031.72 4946,3034 4944,3036 4944,3084.63 4960.47,3101.1 U8.2
NetC26_1: C26.1 R26.2 R28.1 U8.4 | length 144.4
  Top Layer w8: U8.4 5000,3177.32 5000,3120 5001,3119 5001,3081 5000,3080 R26.2@5000,3034
NetC26_2: C26.2 U8.5 | length 65.1
  Top Layer w8: U8.5 5019.53,3151.47 5038,3133 C26.2@5038,3120
NetD1_2: D1.2 R24.2 | length 289.3
  Top Layer w8: R24.2 5458,3330 5458,3182 5503,3137 5503,3102 D1.2@5493,3092
NetD2_1: D2.1 R27.1 | length 85.1
  Top Layer w8: R27.1 5486.53,3222.47 D2.1@5506,3203
NetJ3_1: J3.1 R2.2 | length 293.3
  Top Layer w50: R2.2@5273,2679 5304.29,2710.29 J3.1
NetL1_1: L1.1 U8.22 | length 188
  Top Layer w8: L1.1 4738.25,3220 4847.37,3220 4877.37,3250 U8.22@4902.11,3250
NetL2_1: L2.1 U8.7 | length 208.4
  Top Layer w10: U8.7 5089.06,3210.94 5124,3176 ; L2.1@5244.09,3176 L2.1
  Top Layer w25: 5124,3176 L2.1@5244.09,3176
NetL2_2: L2.2 U8.11 | length 158.9
  Top Layer w10: U8.11 5099.69,3289.69 5100,3290 5100.91,3290 5129.91,3319 ; L2.2@5248.41,3320 L2.2
  Top Layer w25: 5129.91,3319 L2.2@5203,3319
NetMOT_L_A: Left.A R11.1 | length 95
  Top Layer w8: Left.A@3765,3944.88 3765.12,3944.88 3780,3930 3834,3930 R11.1@3848,3916
NetMOT_R_A: R20.1 Right.A | length 105.7
  Top Layer w8: R20.1@4141,4079 4150,4070 4220,4070 4234.88,4055.12 Right.A@4233,4055.12
NetR7_2: R7.2 U3.4 | length 106.1
  Top Layer w8: R7.2 3255,4771 3263.5,4779.5 U3.4
NetR8_2: R8.2 U3.10 | length 117.5
  Top Layer w8: U3.10 3563.5,4779.5 3575,4791 3614.53,4791 R8.2
NetR23_1: R23.1 U8.15 | length 83.8
  Top Layer w8: U8.15 4999.84,3379.84 4999.84,3386.84 5009,3396 5009,3420 R23.1@5011,3422
QEI_0A: J2.8 U5.6 | length 2061.8
  Top Layer w8: U5.6 3855.59,4245.59 v1(3900,4290)
  Bottom Layer w8: v1(3900,4290) 3848,4238 3848,4106.25 3848.25,4106 3856.25,4106 3889,4073.25 3889,4029.86 4138.86,3780 4264.65,3780 4304.5,3740.15 4304.5,3114.5 4110,2920 4040,2920 J2.8
QEI_0A_ANALOG: Left.E1 R16.2 U5.1 | length 650.8
  Top Layer w8: Left.E1@3583.15,4000 3504,4000 3504,4068.11 3557,4121.11 3557,4307 3579.53,4329.53 3659.53,4329.53 R16.2 3693.94,4245.59 U5.1
QEI_0B: J2.9 U5.4 | length 1810
  Top Layer w8: U5.4 3864.41,4194.41 v1(3880,4178.82)
  Bottom Layer w8: v1(3880,4178.82) 3880,4104.88 3905,4079.88 3905,4036.49 4145.49,3796 4271.28,3796 4320.5,3746.78 4320.5,3100.5 J2.9
QEI_0B_ANALOG: Left.E2 R10.1 U5.3 | length 236.5
  Top Layer w8: Left.E2@3583.15,4055.12 3615.12,4055.12 3659.53,4099.53 R10.1 3693.94,4194.41 U5.3
QEI_1A: J2.10 U7.6 | length 1688
  Top Layer w8: v1(4100,4140) 4100,4190 4124.41,4214.41 U7.6
  Bottom Layer w8: v1(4100,4140) 4097,4137 4097,3867.12 4152.12,3812 4277.9,3812 4336.5,3753.4 4336.5,3093.87 4150,2907.37 J2.10
QEI_1A_ANALOG: R21.2 Right.E1 U7.1 | length 342.8
  Top Layer w8: U7.1 4266.06,4214.41 R21.2 4300.47,4149.53 4340,4110 4340,4020 4360,4000 Right.E1@4416.85,4000
QEI_1B: J2.11 U7.4 | length 1849.7
  Top Layer w8: v1(4090,4320) 4090,4300 4124.41,4265.59 U7.4
  Bottom Layer w8: v1(4090,4320) 4090,4214 4140,4164 4140,4120 4128,4108 4128,3978.25 4113,3963.25 4113,3936.75 4128,3921.75 4128,3893.25 4126,3891.25 4126,3860.75 4158.75,3828 4284.53,3828 4352.5,3760.03 4352.5,3087.25 4250,2984.75 J2.11
QEI_1B_ANALOG: R17.2 Right.E2 U7.3 | length 738.7
  Top Layer w8: U7.3 4266.06,4265.59 R17.2 4300,4300.47 4300,4340 4429,4340 4429,4191 v1(4430,4190) ; v1(4355.12,3944.88) Right.E2@4416.85,3944.88
  Bottom Layer w8: v1(4355.12,3944.88) 4355.12,4115.12 v1(4430,4190)
SPI_MISO: J1.1 U4.2 | length 310
  Top Layer w8: U4.2 4639.06,5020.06 4751,5132 4751,5185 J1.1@4748,5188
SPI_MOSI: J1.2 U4.3 | length 285.4
  Top Layer w8: U4.3 4599.69,5061.69 4648,5110 J1.2@4648,5191
SPI_SCK: J1.3 U4.5 | length 274.2
  Top Layer w8: U4.5 4520.94,5077.94 4547,5104 J1.3@4547,5189
SPI_SS_ACCEL: J1.4 U4.6 | length 283.3
  Top Layer w8: J1.4@4448,5195 4448,5124 4481.57,5090.43 U4.6
SPI_SS_AUDIO: J1.5
SPI_SS_LED: J1.6
VBAT: J2.14 R2.1 | length 682.6
  Top Layer w50: J2.14@4550,2832 4550,2793 4665,2678 R2.1@5146,2678
"VBAT +300": C21.2 C24.1 L1.2 U8.9 U8.20 | length 1244.6
  Top Layer w10: L1.2@4790,3329.69 4820.31,3329.69 ; 4820.63,3330 4840,3330 4880,3290 U8.20@4907.32,3290 ; U8.9 5099.68,3250.32 v1(5130,3220)
  Top Layer w25: C21.2 4710,3410 v1(4730,3390) L1.2 ; C24.1 v1(5212.44,3442.44)
  Bottom Layer w25: v1(4730,3390) 4730,3430 4800,3500 5160,3500 5210,3450 5210,3260 5170,3220 v1(5130,3220)
VBAT_MOT_SW: C19.1 C20.2 R1.2 U6.13 | length 2072
  Top Layer w10: C20.2@3739.69,3560 3740,3559.69 C19.1 ; U6.13 4000,3610
  Top Layer w25: C20.2@3746,3552 3746,3155 3832,3069 4106,3069 4127,3090 R1.2 ; 4000,3610 v1(4000,3740) ; R1.2@4165,3095 4165,3156 4240,3231 v1(4240,3350)
  Bottom Layer w25: v1(4000,3740) 4270,3740 4280,3730 4280,3390 v1(4240,3350)
VBAT_SW: J2.13 P1.3 R1.1 U8.19 | length 2805.4
  Top Layer w25: J2.13@4450,2827 J2.13@4455,2832
  Top Layer w30: P1.3@3411,3506 P1.3@3412,3507 ; J2.13@4453,2836 4453,2903
  Top Layer w40: P1.3@3409,3501 3375,3501 3316,3442 3316,3251 3372,3195 3493,3195 3727,2961 4274,2961 ; R1.1@4274,3081 4274,2961 ; 4905,3332 4763,3474 4558,3474 4504,3420 4504,2954 4453,2903 4332,2903 4274,2961
VDDA: C9.2 C10.2 C15.2 C16.2 C51.2 L3.1 U3.14 U3.15 U3.16 U4.4 U4.10 U4.11 U4.12 U4.13 | length 2102.5
  Top Layer w8: C10.2@3354,4992 3373.5,4972.5 U3.16 U3.15 U3.14@3433.44,4908.44 ; U3.14 3436.5,4952 ; C9.2@3474,4992 3436.5,4954.5 3436.5,4952 ; C51.2@3928,4542 3928,4580 3867,4641 3867,4719 3634,4952 3436.5,4952 ; C51.2@3929,4542 3939.5,4531.5 L3.1 L3.1@3981.5,4540 ; L3.1@3990,4533 4024,4567 4457,4567 4519.69,4629.69 C16.2@4519.69,4680 ; C16.2@4520.94,4681.94 U4.10 ; U4.10@4523.63,4754.37 U4.11 U4.12 U4.13 C15.2@4639.06,4680.06 ; U4.11@4560.31,4762.69 U4.4
pads on no net: J1.9 J1.12 J1.13 J1.14 J1.15 J1.16 Left.NC Right.NC U4.1 U4.7 U6.8 U6.9 U8.18
copper on no net:
  other v3: 3010,3650 4990,3660 3010,4340 4990,4350
  other v4: 2960,2830 5040,2830 2960,5170 5040,5170
  other v5: 3728.35,2400 4271.65,2400 3728.35,5600 4271.65,5600

## Polygon pours and split planes (outlines as drawn)
GND on Bottom Layer "Bottom Layer-gnd" (solid, pour order 1000): 4440.04,2570 5603.8,2570 5603.8,2040 4440.04,2040
GND on Bottom Layer "Bottom Layer-gnd" (solid, pour order 1000): 3562,4468 4423,4468 4423,3489 3562,3489
GND on Bottom Layer "Bottom Layer-gnd" (solid, pour order 1001): 4480,3510 6030,3510 6030,2820 5720,2600 4480,2600
GND on Bottom Layer "Bottom Layer-gnd" (solid, pour order 1000): 2030,3509 4450,3509 4450,2050 2030,2050
GND on Bottom Layer "Bottom Layer-No Net" (solid, pour order 1000): 3847.08,4796.71 3401.83,4520 3105,4520 3105,5096.47 3123.55,5108 4886,5108 4886,4520 3401.83,4520

## Keep-outs
Top Layer:
  lines w40 net VBAT: 4543,2832 4550,2832

## Other copper
Top Layer:
  rectangle net MOT0_CUR: 3938,3535 3959,3560
  rectangle net MOT1_CUR: 4040,3535 4061,3560
  region net MOT0_CUR: 3918,3583 3904,3564 3893,3577 3893,3583
  region net MOT1_CUR: 4082,3583 4096,3564 4107,3577 4107,3583
  region net MOT1_A: 4112,3539 4107,3535 4096,3514 4096,3504 4104,3504 4129,3521
  region net MOT_0A: 3888,3539 3893,3535 3904,3514 3904,3504 3896,3504 3871,3521
  region net MOT_0B: 3972,3609 3984,3582 3975,3577 3948,3603 3948,3609
  region net MOT1_B: 4028,3610 4016,3583 4025,3578 4052,3604 4052,3610
  region net VBAT_MOT_SW: 3988,3609 3988,3605 3995,3590 4005,3590 4012,3605 4012,3609
  region net 5VUSB_SW: 4898.32,3270 4852,3282 4835,3282 4835,3258 4853,3258
  region net 3.3V: 5075.34,3270 5125.66,3282 5134.66,3282 5134.66,3258 5122.66,3258
  region net VBAT_SW: 4890,3309 4925,3309 4925,3333 4890,3331.97
  region net NetL2_2: 5098,3294 5122,3329 5144,3330 5142,3306 5104,3287
  region net "VBAT +300": 5094,3248 5118,3213 5140,3212 5138,3236 5100,3255
  region net NetL2_1: 5086,3207 5117,3164 5129,3164 5122,3188 5092,3214
Multi-Layer:
  circle w10: c4000,4000 r1950

## Silkscreen, mask and mechanical layers (free items; w line width, h text height)
Top Overlay:
  drawing of 2369 lines, arcs and shapes, not listed
  text "HCOMM" at 4836,5347 h45 r270
  text "sck" at 4569,5242 h60 r90
  text "mosi" at 4768,5240 h60 r90
  text "selA" at 4474,5239 h60 r90
  text "gnd" at 4173,5237 h50 r90
  text "miso" at 4669,5237 h60 r90
  text "gX" at 3794,5234 h60 r90
  text "gZ" at 3899,5232 h60 r90
  text "Accel" at 4843,4966 h80
  text "Gyro" at 2710,4932 h80
  text "Motor" at 2545,4533 h80
  text "Motor" at 5071,4511 h80
  text "+" at 4342,3732 h60
  text "+" at 3543,3724 h60
  text "EN" at 3256,3568 h45
  text "VBAT" at 3177,3476 h45
  text "GND" at 3215,3377 h45
  text "Turbo9v" at 2803,3263 h80
  text "chg" at 5617,3156 h45 r50
  text "Motor" at 3590,3056 h80
  text "pow" at 5517,3003 h45 r50
  text "Driver" at 3590,2939 h80
  text "5Vusb" at 4629,2757 h45 r270
  text "Q1B" at 4234,2756 h45 r270
  text "VBATsw" at 4414,2755 h45 r270
  text "33V" at 4726,2755 h50 r270
  text "Q0B" at 4027,2754 h45 r270
  text "VBAT" at 4532,2754 h45 r270
  text "Q1A" at 4127,2753 h45 r270
  text "M1" at 3327,2751 h45 r270
  text "GND" at 3420,2750 h45 r270
  text "Q0A" at 3929,2750 h45 r270
  text "chgen" at 4328,2750 h45 r270
  text "M0" at 3229,2749 h45 r270
  text "p0B" at 3633,2749 h45 r270
  text "p0A" at 3523,2748 h45 r270
  text "p1A" at 3736,2745 h45 r270
  text "p1B" at 3839,2745 h45 r270
  text "HMOT" at 3175,2728 h45 r90
  text "Power" at 4851,2585 h80
  text "rone-v1.6" at 3767,2501 h60
  text "www.mrsl.rice.edu" at 3533,2249 h60
Mechanical 1:
  circle w10: c4000,4000 r1850
  circle w10: c5040,2830 r160
  lines w5: 1610,4000 7540,4000 ; 4000,810 4000,6740
Mechanical 3:
  lines w10: 3802.69,3530.69 3815.75,3515.45 3815.69,3538.69
Mechanical 4:
  region: 5950,3570 cw(c5930,3570) 5930,3550 ccw(c5930,3520) 5900,3520 5900,3420 cw(c5800,3420) 5800,3320 5600,3320 cw(c5600,3420) 5500,3420 5500,4620.24 cw(c5600,4620.24) 5600,4720.24 5800,4720.24 cw(c5800,4620.24) 5900,4620.24 5900,4520 ccw(c5930,4520) 5930,4490 cw(c5930,4470) 5950,4470
  region: 2050,4430 cw(c2070,4430) 2070,4450 ccw(c2070,4480) 2100,4480 2100,4580 cw(c2200,4580) 2200,4680 2400,4680 cw(c2400,4580) 2500,4580 2500,3379.76 cw(c2400,3379.76) 2400,3279.76 2200,3279.76 cw(c2200,3379.76) 2100,3379.76 2100,3480 ccw(c2070,3480) 2070,3510 cw(c2070,3530) 2050,3530
Mechanical 6:
  lines w250: 3073,2253 5073,2253